# Altium PCB oscilostor.PcbDoc (part 2 of 2)
Units mm, origin at the board's own origin, x right, y up, seen from the top; angles counter-clockwise.
Board outline 113.66 x 82.55 mm, 2 copper layers (Top Layer, Bottom Layer); 162 components, 136 nets, 565 pads, 67 vias.
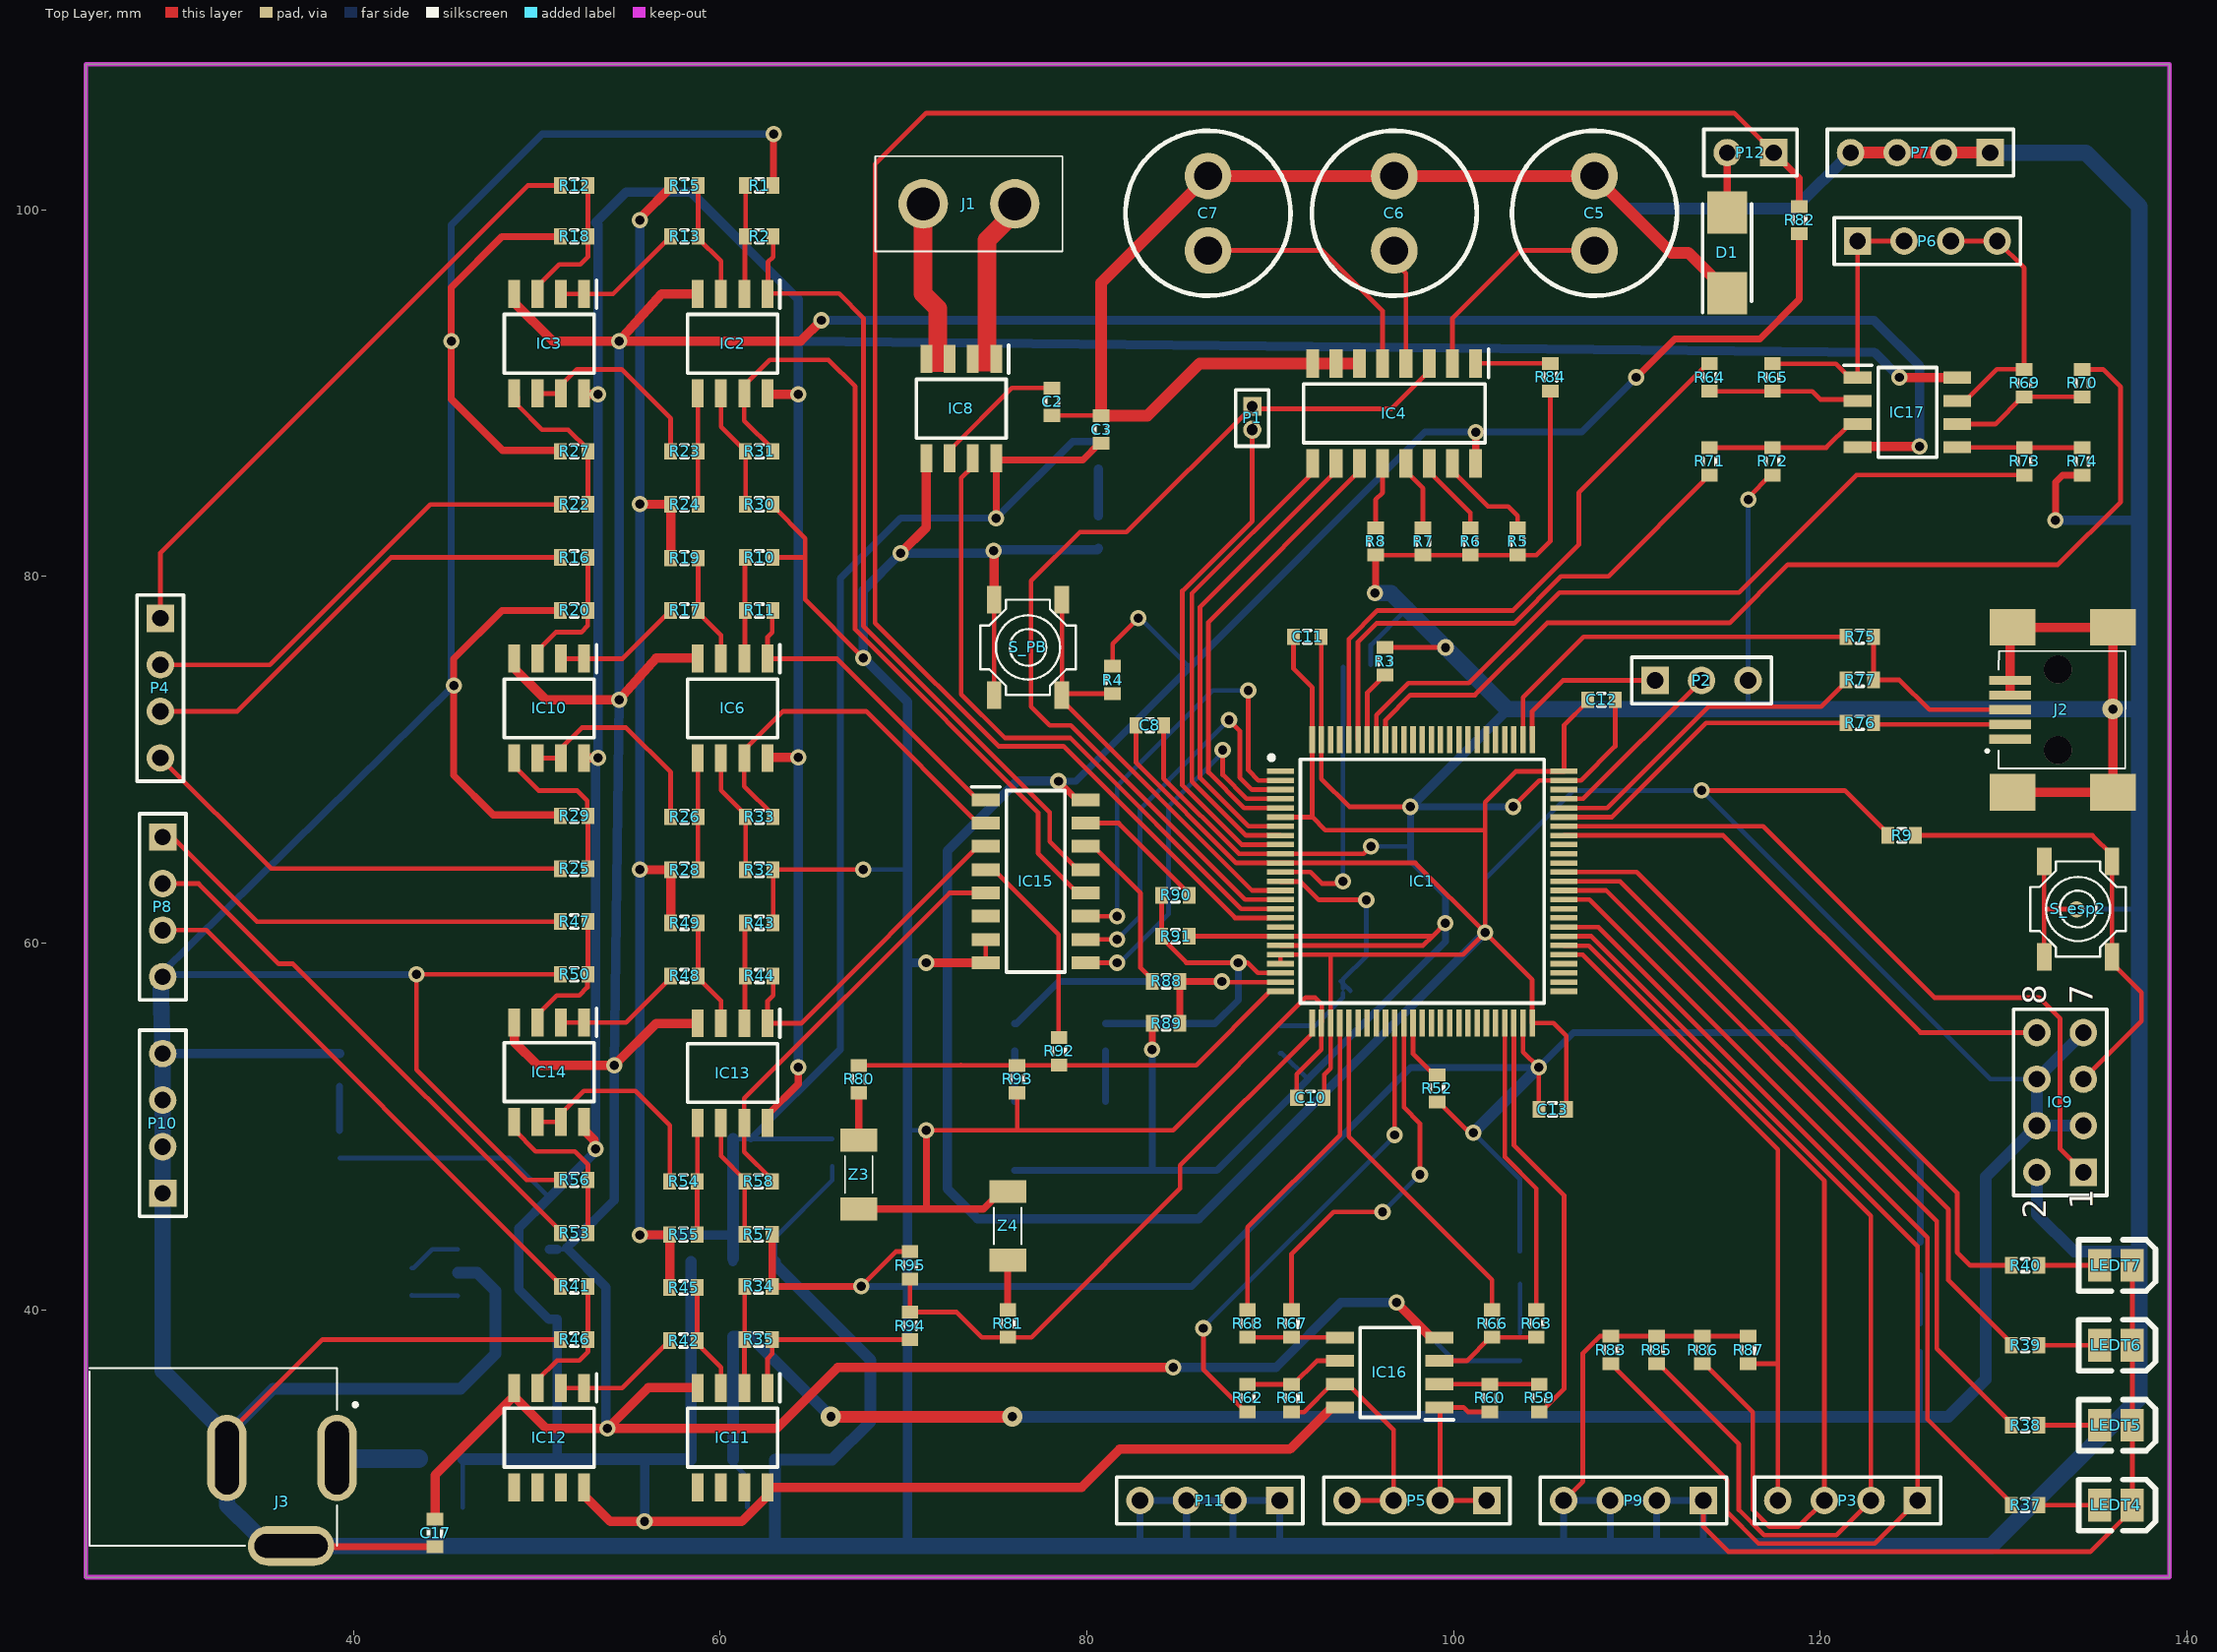
[diagram p0: Top Layer view]

## Via types
v1: diameter 0.889, hole 0.508, Top Layer to Bottom Layer, 48 vias
v2: diameter 0.9, hole 0.5, Top Layer to Bottom Layer, 16 vias
v3: diameter 1.1, hole 0.5, Top Layer to Bottom Layer, 2 vias
v4: diameter 1.143, hole 0.5, Top Layer to Bottom Layer, 1 vias

## Nets (pads, with @x,y where several pads share a name; then routed paths per layer and width w, separated by ;. In a path a pad name is that pad's centre, name@x,y a point inside that pad or via, vN(x,y) a via of type N, cw(c..) or ccw(c..) an arc to the next point about the centre after c; other vN are vias at no path point) (continued)
oscopeADC4Double: IC11.1 R35.1 R94.1 | length 10.3
  Top Layer w0.254: IC11.1 62.587,37.338 62.841,37.592 R35.1 ; R35.1@62.841,38.422 R35.1 ; R94.1 62.846,38.366 R35.1
RCMeterADC: IC1.15 IC4.3 P1.1 | length 51.8
  Top Layer w0.254: IC1.15 88.63,62.373 79.121,71.882 77.978,71.882 76.962,72.898 76.962,79.756 79.629,82.423 82.169,82.423 P1.1 89.154,89.154 96.633,89.154 98.679,91.2 IC4.3
RCMeterS1: IC1.5 IC4.11 | length 25
  Top Layer w0.254: IC1.5 88.583,67.373 86.638,69.318 86.638,77.519 94.869,85.75 IC4.11
RCMeterS2: IC1.7 IC4.10 | length 25.7
  Top Layer w0.254: IC1.7 88.828,66.373 86.184,69.017 86.184,78.335 93.599,85.75 IC4.10
RCMeterS3: IC1.8 IC4.9 | length 26.1
  Top Layer w0.254: IC1.8 88.686,65.873 85.73,68.829 85.73,79.084 92.329,85.683 IC4.9
RCMeterTogglePin: IC1.9 P1.2 | length 27.7
  Top Layer w0.254: P1.2 89.027,83.023 85.217,79.213 85.217,68.601 88.445,65.373 IC1.9
reset_esp: IC9.5 R9.1 S_esp2.1 | length 25.5
  Top Layer w0.254: R9.1 134.86,65.873 135.924,64.81 135.924,64.46 135.924,59.26 135.924,58.91 137.541,57.292 137.541,55.753 ; IC9.5 137.541,55.753 ; 137.541,55.88 137.541,55.753
SWCLK: IC1.76 P2.1 | length 8.9
  Top Layer w0.254: IC1.76 104.298,72.644 105.984,74.33 P2.1
SWDIO: IC1.72 P2.2 | length 10.2
  Top Layer w0.254: IC1.72 107.081,67.873 P2.2
USB_DM: IC1.70 R76.2 | length 17.5
  Top Layer w0.254: IC1.70 108.656,66.873 113.792,72.009 R76.2
USB_DP: IC1.71 R77.2 | length 18.3
  Top Layer w0.254: IC1.71 108.394,67.373 113.919,72.898 120.064,72.898 121.424,74.258 R77.2
USB_on: IC1.77 R75.2 | length 21.3
  Top Layer w0.254: IC1.77 103.798,73.406 107.1,76.708 R75.2
pads on no net: IC1.1 IC1.18 IC1.31 IC1.32 IC1.33 IC1.34 IC1.38 IC1.39 IC1.40 IC1.41 IC1.42 IC1.43 IC1.44 IC1.45 IC1.46 IC1.51 IC1.52 IC1.53 IC1.54 IC1.59 IC1.60 IC1.65 IC1.66 IC1.67 IC1.73 IC1.78 IC1.79 IC1.80 IC1.81 IC1.82 IC1.83 IC1.84 IC1.85 IC1.86 IC1.87 IC1.88 IC1.89 IC1.90 IC1.91 IC1.97 IC1.98 IC11.5 IC11.6 IC11.7 IC12.5 IC12.6 IC12.7 IC15.6 IC18.1 IC18.6 IC18.7 J2.1 J2.7 J2.8

## Keep-outs
Keep-Out Layer:
  the board outline again, w0.254

## Other copper
Top Layer:
  region net currentMeterIn-: 70.993,92.583 70.993,91.186 72.771,91.186 72.771,92.583
  region net currentMeterIn+: 73.533,92.583 73.533,91.2 75.311,91.2 75.311,92.583

## Text inside footprints (layer, text, board x,y; h text height)
IC9: Top Overlay "2" at 132.334,44.958 h1.27 r90; Top Overlay "1" at 134.874,45.466 h1.27 r90; Top Overlay "7" at 134.874,56.642 h1.27 r90; Top Overlay "8" at 132.334,56.642 h1.27 r90